# EAGLE board rev1 (EAGLE 9.4.2)
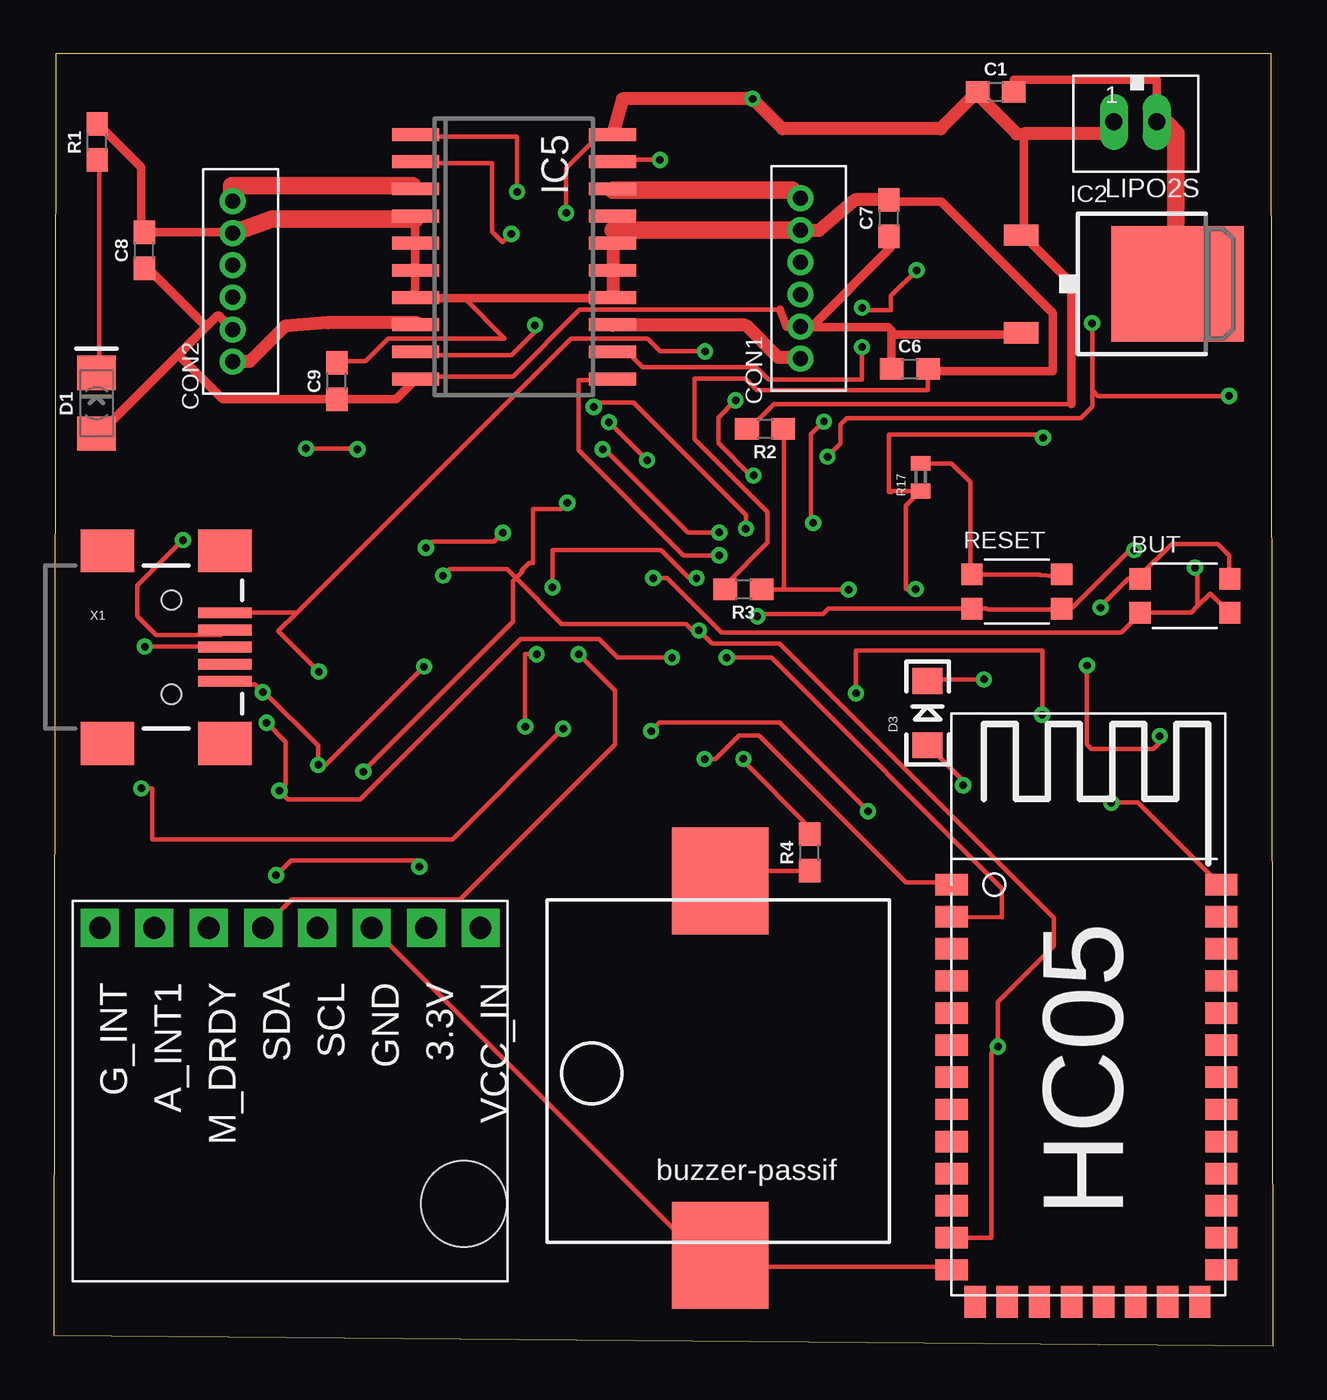
[diagram p0: board, top side]
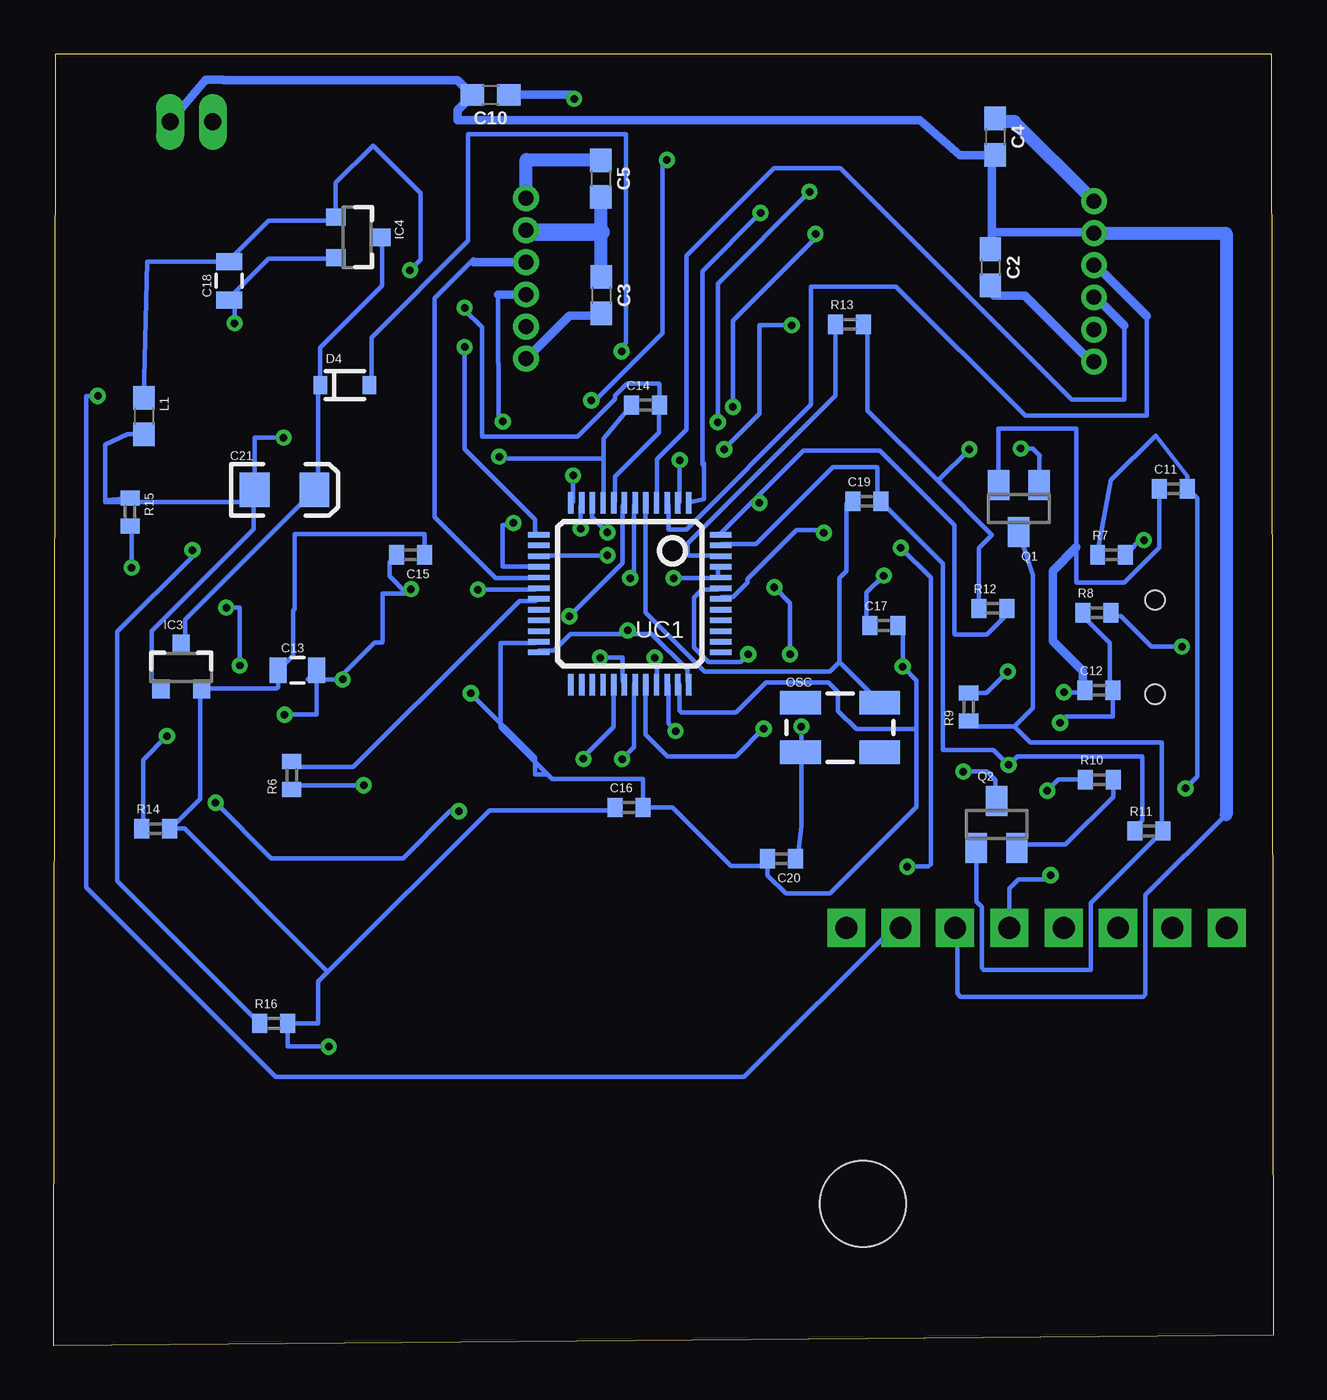
[diagram p1: board, bottom side, seen from below]

Size 57 x 60.4 mm. Coordinates in mm from the lower left corner, seen from the top.
Outline: 0,0.5 57,0 56.9,60.4 0.1,60.4 0,0.5
Copper layers (1*16): Top 0.035mm / dielectric 1.5mm / Bottom 0.035mm
Design rules "default": minimum track width 6mil, minimum drill 0.35mm, track to track 6mil, track to pad 6mil, pad to pad 6mil, via to via 6mil, smd to smd 6mil, copper to edge 40mil, drill to drill 6mil, minimum pad ring 10mil, minimum via ring 8mil, stop-mask expansion 4mil, vias tented up to drill 0mil, thermal gap 10mil
Net classes: 0 default: width 0.203 mm; 2 bigalime: width 0.381 mm

## Footprints (pad centres in the part's own frame; a part is rotated, then mirrored left to right if it is on the bottom)
PUSHBUTTON-KMR241GLFS = smd 1 x 1: P$1 2.1,0.8; P$2 2.1,-0.8; P$3 -2.1,0.8; P$4 -2.1,-0.8
0603 = smd 1.1 x 1: 1 -0.85,0; 2 0.85,0
C0402 = smd 0.7 x 0.9: 1 -0.65,0; 2 0.65,0
0805 = smd 0.8 x 1.2: 1 -0.9,0; 2 0.9,0
EIA3216 = smd 1.4 x 1.6: A 1.4,0; C -1.4,0
B6B-ZR = drill 0.7: 1 9,-1.3; 2 7.5,-1.3; 3 6,-1.3; 4 4.5,-1.3; 5 3,-1.3; 6 1.5,-1.3
FKIT-LED-1206 = smd 1.6 x 1.803: A -1.422,0; C 1.422,0
LED-1206 = smd 1.2 x 1.4: A -1.5,0; C 1.5,0
SOD-323 = smd 0.63 x 0.83: 1 -1.15,0; 2 1.15,0
DPACK_3 = smd 1 x 1.6: 1 -2.28,-4.8; 3 2.28,-4.8 | smd 5.4 x 6.2: 4 0,2.5
SOT23 = smd 0.8 x 0.9: 1 -0.95,-1; 2 0.95,-1; 3 0,1.1
SO20 = smd 0.6 x 2.2: 1 -5.715,-4.6; 2 -4.445,-4.6; 3 -3.175,-4.6; 4 -1.905,-4.6; 5 -0.635,-4.6; 6 0.635,-4.6; 7 1.905,-4.6; 8 3.175,-4.6; 9 4.445,-4.6; 10 5.715,-4.6; 11 5.715,4.6; 12 4.445,4.6; 13 3.175,4.6; 14 1.905,4.6; 15 0.635,4.6; 16 -0.635,4.6; 17 -1.905,4.6; 18 -3.175,4.6; 19 -4.445,4.6; 20 -5.715,4.6
JST_B2B-PH_HEADER = drill 0.8 long: P1 1.075,0.048; P2 -0.925,0.048
CRYSTAL-SMD-5X3 = smd 1.9 x 1.1: 1 -1.85,-1.15; 2 1.85,-1.15; 3 1.85,1.15; 4 -1.85,1.15
SOT23' = smd 1 x 1.4: 1 -0.95,-1.1; 2 0.95,-1.1; 3 0,1.1
BUZZER-PASSIF = smd 4.5 x 5: P$1 0,2.5; P$2 0,20
HC-05 = smd 1.5 x 1: 3.3 0,-16.5; GND 0,-18; KEY 12.6,0; P$3 0,-3; P$4 0,-4.5; P$5 0,-6; P$6 0,-7.5; P$7 0,-9; P$8 0,-10.5; P$9 0,-12; P$10 0,-13.5; P$11 0,-15; P$23 12.6,-1.5; P$24 12.6,-3; P$25 12.6,-4.5; P$26 12.6,-6; P$27 12.6,-7.5; P$28 12.6,-9; P$29 12.6,-10.5; P$30 12.6,-12; P$31 12.6,-13.5; P$32 12.6,-15; P$33 12.6,-16.5; P$34 12.6,-18; RX 0,-1.5; TX 0,0 | smd 1 x 1.5: P$14 1.1,-19.5; P$15 2.6,-19.5; P$16 4.1,-19.5; P$17 5.6,-19.5; P$18 7.1,-19.5; P$19 8.6,-19.5; P$20 10.1,-19.5; P$21 11.6,-19.5
GY-85 = drill 1.016 pad 1.778 square: 3.3 0,15.24; A_INT1 0,2.54; G_INT 0,0; GND 0,12.7; M_DRDY 0,5.08; SCL 0,10.16; SDA 0,7.62; VCC_IN 0,17.78 | hole 4: 12.9,17
LQFP48 = smd 0.254 x 1: 1 -2.75,-4.25; 2 -2.25,-4.25; 3 -1.75,-4.25; 4 -1.25,-4.25; 5 -0.75,-4.25; 6 -0.25,-4.25; 7 0.25,-4.25; 8 0.75,-4.25; 9 1.25,-4.25; 10 1.75,-4.25; 11 2.25,-4.25; 12 2.75,-4.25; 25 2.75,4.25; 26 2.25,4.25; 27 1.75,4.25; 28 1.25,4.25; 29 0.75,4.25; 30 0.25,4.25; 31 -0.25,4.25; 32 -0.75,4.25; 33 -1.25,4.25; 34 -1.75,4.25; 35 -2.25,4.25; 36 -2.75,4.25 | smd 1 x 0.254: 13 4.25,-2.75; 14 4.25,-2.25; 15 4.25,-1.75; 16 4.25,-1.25; 17 4.25,-0.75; 18 4.25,-0.25; 19 4.25,0.25; 20 4.25,0.75; 21 4.25,1.25; 22 4.25,1.75; 23 4.25,2.25; 24 4.25,2.75; 37 -4.25,2.75; 38 -4.25,2.25; 39 -4.25,1.75; 40 -4.25,1.25; 41 -4.25,0.75; 42 -4.25,0.25; 43 -4.25,-0.25; 44 -4.25,-0.75; 45 -4.25,-1.25; 46 -4.25,-1.75; 47 -4.25,-2.25; 48 -4.25,-2.75
USB-MINIB = smd 2.5 x 0.5: D+ 2.5,0; D- 2.5,0.8; GND 2.5,-1.6; ID 2.5,-0.8; VBUS 2.5,1.6 | smd 2.5 x 2: GND@1 -3,-4.5; GND@2 -3,4.5; GND@3 2.5,4.5; GND@4 2.5,-4.5 | hole 0.9: 0,2.2; 0,-2.2

## Placement (x,y rotation side)
BUT  KMR211GLFS  [PUSHBUTTON-KMR241GLFS]  52.87,35.06 0 top
C1  0.1uF  [0603]  44.03,58.61 0 top
C2  22nF  [0603]  13.22,50.41 270 bottom
C3  22nF  [0603]  31.41,49.11 270 bottom
C4  22nF  [0603]  13,56.51 270 bottom
C5  22nF  [0603]  31.43,54.56 270 bottom
C6  0.1uF  [0603]  40.02,45.66 0 top
C7  22nF  [0603]  39.04,52.71 90 top
C8  22nF  [0603]  4.24,51.2 90 top
C9  22nF  [0603]  13.24,45.09 90 top
C10  22nF  [0603]  36.58,58.46 180 bottom
C11  47pF  [C0402]  4.67,40.06 0 bottom
C12  47pF  [C0402]  8.14,30.64 0 bottom
C13  10uF  [0805]  45.6,31.58 0 bottom
C14  1uF  [C0402]  29.33,43.97 0 bottom
C15  1uF  [C0402]  40.32,36.97 180 bottom
C16  1uF  [C0402]  30.11,25.17 0 bottom
C17  1uF  [C0402]  18.2,33.67 0 bottom
C18  10uF  [0805]  48.79,49.78 90 bottom
C19  18pF  [C0402]  18.99,39.47 0 bottom
C20  18pF  [C0402]  22.98,22.77 180 bottom
C21  100uF  [EIA3216]  46.21,40.01 0 bottom
CON1  B6B-ZR  [B6B-ZR]  33.61,44.64 90 top
CON2  B6B-ZR  [B6B-ZR]  7.07,44.5 90 top
D1  [FKIT-LED-1206]  2.01,44.06 90 top
D3  Blue  [LED-1206]  40.85,29.58 90 top
D4  [SOD-323]  43.39,44.91 0 bottom
IC2  MC78M05ABDT  [DPACK_3]  50.02,49.63 270 top
IC3  MCP1703T-3302E/CB  [SOT23]  51.03,31.71 0 bottom
IC4  MCP1703T-3302E/CB  [SOT23]  42.81,51.81 270 bottom
IC5  L293DD  [SO20]  21.52,50.9 270 top
L1  ferrite bead  [0603]  52.78,43.46 270 bottom
LIPO2S  JST-PH_2-PIN_HEADER  [JST_B2B-PH_HEADER]  50.63,57.25 180 top
OSC  8MHz  [CRYSTAL-SMD-5X3]  20.24,28.9 0 bottom
Q1  NPN-BJT  [SOT23']  11.89,39.13 180 bottom
Q2  NPN-BJT  [SOT23']  12.93,24.38 0 bottom
R1  133  [0603]  2.04,56.27 90 top
R2  60k  [0603]  33.26,42.86 180 top
R3  30k  [0603]  32.25,35.36 180 top
R4  100  [0603]  35.34,23.06 90 top
R6  1k  [C0402]  45.87,26.67 90 bottom
R7  22  [C0402]  7.56,36.97 0 bottom
R8  22  [C0402]  8.25,34.27 0 bottom
R9  10k  [C0402]  14.24,29.87 90 bottom
R10  1.5k  [C0402]  8.13,26.47 0 bottom
R11  36k  [C0402]  5.82,24.07 0 bottom
R12  47k  [C0402]  13.11,34.47 0 bottom
R13  1k  [C0402]  19.8,47.75 0 bottom
R14  1k  [C0402]  52.23,24.18 0 bottom
R15  10k  [C0402]  53.42,38.98 270 bottom
R16  10k  [C0402]  46.71,15.08 0 bottom
R17  1k  [C0402]  40.52,40.6 90 top
RESET  KMR211GLFS  [PUSHBUTTON-KMR241GLFS]  45.02,35.26 0 top
U$1  BUZZER-PASSIF  [BUZZER-PASSIF]  31.16,1.74 0 top
U$4  HC05  [HC-05]  41.97,21.56 0 top
U$6  GY-85  [GY-85]  2.17,19.54 270 top
UC1  STM32F103CBT6  [LQFP48]  30.07,35.16 180 bottom
X1  USB-MINIB  [USB-MINIB]  5.52,32.66 0 top

## Library data of the parts
BUT IC3 IC4 RESET = okie
C1 C6 = SparkFun-Capacitors; PROD_ID: CAP-00810
C2-C5 C7-C10 = SparkFun-Capacitors; PROD_ID: CAP-07885
C11 C12 C14-C17 C19 C20 D3 R6-R17 = SparkFun
C13 C18 OSC Q1 Q2 X1 = SparkFun2
C21 D4 L1 = SparkFun3
CON1 CON2 = jst
D1 = SparkFun-LED
IC2 = linear
IC5 = st-microelectronics; OC_FARNELL: unknown
LIPO2S = srg
R1-R4 = SparkFun-Resistors; PROD_ID: RES-08787
U$1 = buzzer_smd
U$4 = rhoban; FARNELL: MODULE HC-05
U$6 = rhoban
UC1 = stm32

## Nets
1A: IC5.2 UC1.11
2A: IC5.9 UC1.10
3/AIN: R2.1 R3.1 UC1.18
3A: IC5.12 UC1.13
4A: IC5.19 UC1.12
5V: C6.1 C7.1 C8.1 C9.1 CON1.5 CON2.5 D1.A IC2.3 IC5.10
23_USBDP: C12.2 R8.1 R10.1 UC1.33
24_USBDM: C11.2 R7.1 UC1.32
27/PWM: R4.2 UC1.29
32: BUT.P$2 BUT.P$4 R15.2 UC1.44 UC1.45
33: R6.2 UC1.19
+5V/2: D4.2 R9.2 X1.VBUS
AV+: C14.1 C18.1 IC4.2 U$6.3.3 UC1.9
AV-: C14.2 C18.2 IC4.1 L1.1 UC1.8
DGND: C11.1 C12.1 C13.2 C15.2 C16.2 C17.2 C19.2 C20.2 C21.C D3.C IC3.1 L1.2 Q1.2 R11.1 R15.1 R17.1 UC1.23 UC1.35 UC1.47 X1.GND
DISC: R13.1 UC1.46
EN: U$4.KEY UC1.34
GNDA: C1.2 C2.1 C3.1 C4.2 C5.2 C6.2 C7.2 C8.2 C9.2 C10.2 CON1.2 CON2.2 IC2.4 IC5.4 IC5.5 IC5.6 IC5.7 IC5.14 IC5.15 IC5.16 IC5.17 LIPO2S.P2 R1.2 R3.2 U$1.P$1 U$4.GND U$6.GND
MM4: CON2.3 UC1.3
MM5: CON2.4 UC1.4
MM6: CON1.4 UC1.16
MM7: CON1.3 UC1.17
MM28: IC5.1 UC1.2
MM29: IC5.11 UC1.15
N$1: D1.C R1.1
N$2: R4.1 U$1.P$2
N$20: BUT.P$1 BUT.P$3 R14.1
N$21: R17.2 RESET.P$1 RESET.P$3
N$22: D3.A R6.1
N$51: Q2.2 R10.2
N$59: R7.2 X1.D-
N$60: R8.2 X1.D+
N$71: Q1.3 Q2.1 R9.1 R11.2
N$73: Q1.1 R12.1 R13.2
NONE: U$6.VCC_IN
OSC_IN: C19.1 OSC.3 UC1.5
OSC_OUT: C20.1 OSC.1 UC1.6
OUT1: C4.1 CON2.1 IC5.3
OUT2: C2.2 CON2.6 IC5.8
OUT3: C3.2 CON1.6 IC5.13
OUT4: C5.1 CON1.1 IC5.18
RESET: R16.1 RESET.P$2 RESET.P$4 UC1.7
RX: U$4.RX UC1.30
SCL: U$6.SCL UC1.42
SDA: U$6.SDA UC1.43
TX: U$4.TX UC1.31
VBAT: C1.1 C10.1 IC2.1 IC5.20 LIPO2S.P1 R2.2 UC1.1
VCC: C13.1 C15.1 C16.1 C17.1 IC3.2 Q2.3 R12.2 R14.2 R16.2 U$4.3.3 UC1.24 UC1.36 UC1.48
VIN: C21.A D4.1 IC3.3 IC4.3

## Tracks (layer width: path | path; a pad name or v marks a point on that pad's centre or on a via)
1A  (via drill 0.35)
  Top 0.203: v32.36,38.19 32.36,38.84 27.11,44.08 25.45,44.08 v25.25,43.88 | v21.39,51.97 20.99,51.57 20.49,52.07 20.49,55.26 17.07,55.26 IC5.2
  Bottom 0.203: v32.36,38.19 32.36,39.26 UC1.11 | v25.25,43.88 25.25,47.92 21.39,51.77 v21.39,51.97
2A  (via drill 0.35)
  Top 0.203: v31.11,38.02 29.65,38.02 25.76,41.91 v25.66,41.91 | IC5.9 17.06,46.31 21.41,46.31 22.5,47.41 v22.5,47.71
  Bottom 0.203: v31.11,38.02 31.83,38.73 31.83,39.26 UC1.10 | v25.66,41.91 24,43.56 24,47.71 v22.5,47.71
3/AIN  (via drill 0.35)
  Top 0.203: 34.14,35.35 33.25,35.35 R3.1 | 34.14,35.35 v37.16,35.35 | 34.14,35.35 34.14,42.82 R2.1
  Bottom 0.203: v37.16,35.35 34.49,35.35 UC1.18
3A  (via drill 0.35)
  Top 0.203: v37.78,46.68 37.78,45.15 33.42,45.15 32.82,45.75 27.52,45.75 26.82,46.45 IC5.12
  Bottom 0.203: v37.78,46.68 37.78,41.91 34.49,38.62 34.49,38.02 UC1.13
4A  (via drill 0.35)
  Top 0.203: v32.72,40.68 32.57,40.68 31.07,42.18 31.07,43.39 v31.87,44.19 | IC5.19 26.2,55.43 v28.34,55.43
  Bottom 0.203: v32.72,40.68 32.72,39.44 UC1.12 | v31.87,44.19 31.67,44.19 28.54,47.33 28.54,55.43 v28.34,55.43
5V
  Top 0.203: 39.17,47.47 39.02,47.62 | 35.03,47.62 CON1.5 | 39.12,51.32 39.12,51.44 C7.1 | 45.16,47.26 IC2.3 | 13.34,44.24 C9.1 13.16,44.24 | 16.89,45.13 IC5.10 17.07,45.31 21.47,45.31 24.59,48.43 33.94,48.43 | 4.49,50.28 4.27,50.28 C8.1 | 2.13,42.64 D1.A | 7.64,48.15 7.72,48.15
  Top 0.406: 39.17,47.47 C6.1 39.17,47.26 45.16,47.26 | 35.03,47.62 35.42,47.62 | 35.42,47.62 39.02,47.62 | 35.42,47.62 39.12,51.32 | 13.34,44.24 16,44.24 16.89,45.13 | 7.13,47.64 4.49,50.28 | 7.13,47.64 7.64,48.15 | 7.13,47.64 5.82,46.33 | 5.82,46.33 2.13,42.64 | 13.16,44.24 7.91,44.24 5.82,46.33 | CON1.5 34.26,47.64 33.94,48.43 | 7.72,48.15 CON2.5
23_USBDP  (via drill 0.35)
  Top 0.203: v9.96,29.13 10.86,28.23 10.86,26.25 v10.56,25.95 10.97,25.54 14.34,25.54 21.84,33.04 25.49,33.04 26.36,32.17 v28.9,32.17
  Bottom 0.203: R8.1 8.89,34.1 7.64,32.86 7.64,30.73 C12.2 7.49,29.43 9.66,29.43 v9.96,29.13 | v10.56,25.95 10.04,26.47 R10.1 | v28.9,32.17 28.8,32.07 28.8,30.93 UC1.33
24_USBDM  (via drill 0.35)
  Top 0.203: v23.81,28.85 18.65,23.68 4.6,23.68 4.6,26.06 v4.1,26.06
  Bottom 0.203: R7.1 8.21,37.06 7.59,40.46 5.5,42.55 4.02,40.65 C11.2 3.91,39.97 3.56,39.62 3.56,26.6 v4.1,26.06 | v23.81,28.85 25.11,27.55 28.3,27.55 29.34,28.58 29.34,30.9 UC1.32
27/PWM  (via drill 0.35)
  Top 0.203: R4.2 35.34,24.24 32.24,27.34 v32.24,27.44
  Bottom 0.203: v32.24,27.44 32.24,27.54 30.84,28.94 30.84,30.91 UC1.29
32  (via drill 0.35)
  Top 0.203: v53.35,36.37 53.45,36.37 53.45,34.57 | BUT.P$2 54.94,34.28 54.05,35.17 53.45,34.57 | 53.45,34.57 53.16,34.28 50.85,34.28 BUT.P$4 50.67,34.1 49.91,33.34 31.23,33.34 28.68,35.88 v28.03,35.88
  Bottom 0.203: 25.96,35.88 25.96,36.42 UC1.45 | v53.35,36.37 53.35,38.33 R15.2 | v28.03,35.88 25.96,35.88 | 25.96,35.88 UC1.44
33
  Bottom 0.203: R6.2 45.6,27.05 42.99,27.05 40.77,29.27 39.27,30.77 35.23,34.81 34.49,34.81 UC1.19
+5V/2  (via drill 0.35)
  Top 0.203: v30.45,46.48 28.35,46.48 27.75,47.08 24.18,47.08 11.38,34.28 | 11.38,34.28 10.51,33.41 v12.4,31.52 | 11.38,34.28 8.18,34.28 X1.VBUS
  Bottom 0.203: v30.45,46.48 30.55,46.58 30.25,46.88 30.25,56.63 37.62,56.63 37.62,51.65 42.14,47.13 42.14,44.95 D4.2 | R9.2 13.4,30.52 v12.4,31.52
AV+  (via drill 0.35)
  Top 0.203: v36.17,41.56 36.77,42.16 36.77,43.06 37.07,43.36 48.01,43.36 48.54,43.9 v48.54,47.8 48.54,44.66 48.8,44.4 v54.93,44.4 | v54.93,44.4
  Bottom 0.203: 31.29,41.46 31.29,42.4 C14.1 | 31.29,41.46 31.29,39.44 UC1.9 | IC4.2 43.98,50.82 46.94,50.82 48.72,49.04 C18.1 48.72,48.86 48.54,48.68 v48.54,47.8 | v36.17,41.56 36.07,41.46 31.29,41.46 | U$6.3.3 17.42,19.52 17.78,19.52 24.73,12.58 46.62,12.58 55.47,21.44 55.47,44.4 v54.93,44.4
AV-  (via drill 0.35)
  Top 0.203: v37.78,48.52 37.88,48.42 39.14,48.42 39.14,49.07 v40.34,50.27
  Bottom 0.203: UC1.8 30.76,39.44 30.76,40.63 28.7,42.68 28.7,43.95 C14.2 28.68,44.94 28.71,44.97 30.2,44.97 30.76,44.42 30.76,44.24 32.5,42.49 36.97,42.49 36.97,47.61 37.78,48.42 v37.78,48.52 | L1.1 52.62,50.68 C18.2 48.72,50.82 46.94,52.59 43.98,52.59 IC4.1 43.81,54.36 42.07,56.1 39.84,53.87 39.84,50.77 v40.34,50.27
DGND  (via drill 0.35)
  Top 0.203: X1.GND 8.18,30.9 9.42,30.9 v9.78,30.55 9.88,30.55 12.37,28.06 v12.37,27.16 12.72,27.16 v17.31,31.75 | v40.29,35.37 39.84,35.37 39.84,39.26 R17.1 39.19,39.95 39.15,39.91 39.05,39.91 39.05,42.58 46.12,42.58 v46.25,42.45 | v43.48,31.15 40.92,31.15 D3.C | v46.2,29.5 46.2,32.5 37.5,32.5 v37.5,30.5
  Bottom 0.203: 8.89,30.73 C12.1 8.89,30.55 v9.78,30.55 | C11.1 5.33,39.97 5.33,37.3 6.96,35.68 9.19,35.68 9.19,37.33 9.19,42.87 12.84,42.87 Q1.2 | R11.1 6.47,24.22 6.12,24.57 6.12,27.56 11.97,27.56 v12.37,27.16 13.07,27.86 15.45,27.86 15.45,36.57 18.31,39.44 C19.2 18.49,39.62 18.49,41.05 18.52,41.08 20.57,41.08 24.17,37.48 25.78,37.48 UC1.47 | 54.59,39.53 54.59,42.12 53.53,42.61 L1.2 | 54.59,39.53 54.59,39.44 47.65,39.44 | IC3.1 52.42,31.15 52.42,33.41 47.65,38.18 47.65,39.44 | 47.65,39.44 47.65,39.97 C21.C | 54.59,39.53 R15.1 | 47.65,39.44 C21.C | v40.29,35.37 40.49,35.17 | 40.49,35.17 41.63,35.17 41.63,32.9 41.68,32.88 42,32.88 43.5,31.38 43.5,31.15 | 40.49,35.17 41.29,35.97 41.29,36.64 C15.2 | v43.48,31.15 43.5,31.15 | 43.5,31.15 45.13,31.15 C13.2 44.7,29.5 v46.2,29.5 | 16.67,28.83 16.67,25.19 20.71,21.15 22.78,21.15 23.63,21.99 C20.2 23.96,22.44 25.34,22.44 28.07,25.17 C16.2 29.46,26.5 33.7,26.5 33.9,26.7 | 16.67,28.83 16.67,31.1 v17.31,31.75 17.31,33.67 C17.2 | 16.67,28.83 19.48,28.83 20.34,29.68 20.34,30.56 20.78,31 23.71,31 25.1,29.61 27.66,29.61 27.74,29.69 27.74,30.9 UC1.35 | UC1.23 34.49,32.86 36.1,32.86 36.1,28.9 33.9,26.7 | 33.9,26.7 34.5,26.7 34.5,27.5 v37.5,30.5 | v46.25,42.45 47.61,42.45 C21.C
  Bottom 0.406: 8.89,30.73 8.89,31.54 10.3,32.95 10.3,36.22 9.19,37.33
DISC
  Bottom 0.203: R13.1 20.45,44.41 27.37,37.49 27.37,37.03 27.29,36.95 25.96,36.95 UC1.46
EN  (via drill 0.35)
  Top 0.203: v27.93,28.74 28.33,29.14 33.91,29.14 v38.06,24.99 | v49.43,25.39 50.67,25.39 54.41,21.66 U$4.KEY
  Bottom 0.203: v27.93,28.74 28.27,29.08 28.27,30.9 UC1.34 | v49.43,25.39 46.83,22.79 40.66,22.79 38.46,24.99 v38.06,24.99
GNDA
  Top 0.203: U$4.GND 41.96,3.7 31.83,3.7 31.29,4.23 U$1.P$1 31.11,4.41 30.05,4.41 14.94,19.52 U$6.GND | 52.45,49.75 IC2.4 | R3.2 31.47,35.53 31.47,35.64 33.37,37.54 33.37,38.96 29.96,42.37 29.96,45.21 32.35,45.21 32.88,44.67 40.87,44.67 C6.2 40.96,45.56 | 4.27,52.06 C8.2 4.09,52.06 | 8.36,52.06 CON2.2 | 2.13,57.04 R1.2 | 26.14,49.04 IC5.14 26.08,48.96 | 26.14,50.11 IC5.15 26.14,50.28 | IC5.17 26.14,52.77 26.14,52.14 26.14,51.71 IC5.16 26.14,51.53 | 16.89,52.77 IC5.4 | 19.2,48.96 21.08,47.08 15.65,47.08 14.58,46.02 13.34,46.02 C9.2 | 16.95,48.96 IC5.7 16.89,49.04 | 16.89,50.11 IC5.6 16.89,50.28 | 16.89,51.53 IC5.5 | CON1.2 | 39.19,53.48 C7.2
  Top 0.406: C1.2 44.88,59.17 51.55,59.17 LIPO2S.P2 | 8.36,52.06 4.27,52.06 | 2.13,57.04 4.09,55.09 4.09,52.06 | 16.89,52.77 16.89,52.66 16.89,51.71 IC5.5 | 16.95,48.96 19.2,48.96 26.08,48.96 | 16.89,49.04 16.89,50.11 | 16.89,50.28 16.89,51.53 | 40.96,45.56 46.71,45.56 46.71,48.27 41.49,53.48 39.19,53.48
  Top 0.61: C7.2 37.47,53.56 35.78,52.14 CON1.2 | 26.14,50.11 26.14,49.04 | 26.14,51.53 26.14,50.28
  Top 0.813: 52.45,49.75 52.45,56.69 52.03,57.11 LIPO2S.P2 | CON1.2 26.14,52.14 | 16.89,52.66 10.19,52.66 CON2.2
  Bottom 0.203: 49.07,59.17 49.04,59.14 | 13.16,51.35 C2.1 | 13.16,55.62 C4.2 | 8.53,52.06 CON2.2 | 34.85,52.06 CON1.2 | 2.2,24.84 5.97,21.07 5.97,16.44 6.08,16.32 14.61,16.32 14.76,16.47 14.76,19.52 U$6.GND | 31.43,52.08 31.41,52.06
  Bottom 0.406: 49.04,59.14 38.11,59.14 C10.2 38.13,57.76 38.13,57.28 16.52,57.28 14.65,55.66 C4.2 | 49.07,59.17 49.89,59.17 LIPO2S.P2 | 13.16,55.62 13.16,52.06 | 13.16,52.06 13.16,51.35 | 8.53,52.06 13.16,52.06
  Bottom 0.61: C3.1 31.41,52.06 | 2.2,24.84 2.2,52 CON2.2 | C5.2 31.43,52.08
  Bottom 0.813: 34.85,52.06 31.41,52.06
MM4
  Bottom 0.203: 5.91,48.12 5.91,43.47 11.59,43.47 17.62,49.51 21.59,49.51 21.59,43.98 27.43,38.15 28.27,38.15 28.27,39.26 UC1.3 | CON2.3 8.3,50.5
  Bottom 0.406: 8.3,50.5 5.91,48.12
MM5
  Bottom 0.203: 6.97,47.67 6.97,44.23 9.41,44.23 20.24,55.05 23.32,55.05 27.43,50.95 27.43,42.83 28.8,41.45 28.8,39.44 UC1.4 | CON2.4 8.3,49
  Bottom 0.406: 8.3,49 6.97,47.67
MM6  (via drill 0.35)
  Top 0.203: v36,43.2 35.4,42.6 35.4,38.56 v35.5,38.46
  Bottom 0.203: v35.5,38.46 35.6,38.36 36,38.36 36,36.42 34.49,36.42 UC1.16 | v36,43.2 36.2,43.41 36.2,45.93 36.22,45.94 36.22,49.14
  Bottom 0.406: 36.22,49.14 CON1.4
MM7
  Bottom 0.203: UC1.17 34.49,35.88 36.35,35.88 39.19,38.73 39.19,48.97 37.38,50.79 37.38,50.64
  Bottom 0.406: 37.38,50.64 CON1.3
MM28  (via drill 0.35)
  Top 0.203: v27.74,41.39 v25.96,43.17 | v21.67,53.94 21.67,56.51 17.07,56.51 IC5.1
  Bottom 0.203: v27.74,41.39 27.74,39.44 UC1.2 | v25.96,43.17 25.96,49.65 v21.67,53.94
MM29  (via drill 0.35)
  Top 0.203: v31.11,36.95 29.45,36.95 24.54,41.86 24.54,45.13 25.96,45.13 IC5.11
  Bottom 0.203: v31.11,36.95 34.31,36.95 UC1.15
N$1
  Top 0.203: R1.1 2.13,55.26 2.13,45.48 D1.C
N$2
  Top 0.203: R4.1 35.2,22.19 31.65,22.19 31.29,21.84 U$1.P$2
N$20  (via drill 0.35)
  Top 0.203: v48.93,34.5 48.93,34.56 50.23,35.86 BUT.P$3 50.77,36 52.25,37.48 54.41,37.48 54.94,36.95 54.94,35.88 BUT.P$1 | v48.3,31.8 48.3,28.1 48.5,27.9 51.4,27.9 51.7,28.2 v51.7,28.5
  Bottom 0.203: R14.1 52.81,24.25 52.81,27.39 v51.7,28.5 | v48.3,31.8 48.3,34.5 v48.93,34.5
N$21
  Top 0.203: R17.2 41.96,41.25 42.85,40.36 42.85,36.2 RESET.P$3 46.08,36.06 46.11,36.03 47.01,35.95 RESET.P$1
N$22  (via drill 0.35)
  Top 0.203: v42.51,26.2 42.51,26.42 D3.A
  Bottom 0.203: R6.1 45.87,26.2 v42.51,26.2
N$51
  Bottom 0.203: R10.2 7.48,25.67 9.71,23.44 11.91,23.44 Q2.2
N$59  (via drill 0.35)
  Top 0.203: v6.04,37.66 3.91,35.53 3.91,34.1 4.8,33.22 7.82,33.22 8,33.39 X1.D-
  Bottom 0.203: v6.04,37.66 6.22,37.66 6.76,37.13 R7.2
N$60  (via drill 0.35)
  Top 0.203: v4.27,32.68 8,32.68 X1.D+
  Bottom 0.203: v4.27,32.68 5.69,32.68 7.11,34.1 7.47,34.1 R8.2
N$71
  Bottom 0.203: 12.09,28.95 11.36,28.21 5.21,28.21 5.21,24.09 R11.2 8.53,20.7 8.53,17.58 13.54,17.58 13.61,17.66 13.61,20.51 13.87,20.77 13.87,23.26 Q2.1 | 12.09,28.95 14.18,28.95 R9.1 | 12.09,28.95 11.23,29.8 11.23,36.03 Q1.3
N$73  (via drill 0.35)
  Top 0.203: v11.8,41.94 14.16,41.94 v14.2,41.9
  Bottom 0.203: R12.1 13.76,37.29 13.15,37.91 15.72,40.48 | R13.2 18.96,47.55 18.96,43.72 15.72,40.48 | Q1.1 10.94,41.56 10.9,41.6 11.24,41.94 v11.8,41.94 | v14.2,41.9 15.62,40.48 15.72,40.48
OSC_IN
  Bottom 0.203: 20.27,31.97 20.27,35.88 19.94,36.22 19.94,39.38 C19.1 | 20.27,31.97 18.49,30.19 OSC.3 | 20.27,31.97 20.73,31.52 26.57,31.52 29.34,34.28 29.34,39.26 UC1.5
OSC_OUT  (via drill 0.35)
  Top 0.203: v30.05,35.88 29.69,35.88 28.38,37.19 23.31,37.19 v23.31,35.46 | v22.05,28.95 22.05,32.33 v22.58,32.33
  Bottom 0.203: C20.1 22.21,22.88 22.05,24.33 22.05,27.7 OSC.1 22.05,27.88 v22.05,28.95 | v30.05,35.88 29.87,36.06 29.87,39.26 UC1.6 | v23.31,35.46 22.58,34.73 v22.58,32.33
OUT1
  Top 0.203: IC5.3 16.77,54.22 | CON2.1 8.33,53.54
  Top 0.813: 16.77,54.22 8.33,54.22 8.33,53.54
  Bottom 0.203: 12.98,57.22 C4.1
  Bottom 0.406: 8.53,53.66 CON2.1
  Bottom 0.61: 12.98,57.22 12.09,57.22 8.53,53.66
OUT2
  Top 0.61: IC5.8 17.01,47.82 12.82,47.82 10.82,47.65 9.17,46 CON2.6
  Bottom 0.203: 13.04,49.09 C2.2 | 8.56,46.04 8.4,46.03 CON2.6
  Bottom 0.406: 13.04,49.09 11.61,49.09 8.56,46.04
OUT3
  Top 0.203: IC5.13 26.14,47.7 | 34.85,46.2 CON1.6
  Top 0.61: 26.14,47.7 32.36,47.7 33.86,46.2 34.85,46.2
  Bottom 0.203: 31.44,48.15 C3.2 | 34.85,46.2 CON1.6
  Bottom 0.406: 31.44,48.15 32.89,48.15 34.85,46.2
OUT4
  Top 0.203: 26.14,54.02 IC5.18
  Top 0.813: 26.14,54.02 34.53,54.02 CON1.1
  Bottom 0.203: 31.46,55.44 C5.1
  Bottom 0.61: 31.46,55.44 34.91,55.44 CON1.1
RESET  (via drill 0.35)
  Top 0.203: v50.51,37.19 50.31,37.19 47.57,34.46 RESET.P$2 47.09,34.43 43.66,34.43 43.63,34.46 RESET.P$4 36.22,34.46 35.96,34.2 32.99,34.2 v32.89,34.1
  Bottom 0.203: R16.1 54.02,21.74 54.02,33.38 50.51,36.89 v50.51,37.19 | v32.89,34.1 30.4,36.59 30.4,39.26 UC1.7
RX  (via drill 0.35)
  Top 0.203: v31.46,32.17 33.55,32.17 44.33,21.39 44.33,20.04 U$4.RX
  Bottom 0.203: v31.46,32.17 30.4,32.17 30.4,31.08 UC1.30
SCL  (via drill 0.35)
  Top 0.203: v10.4,22 11.1,22.7 17.1,22.7 v17.1,22.4 | v17.4,37.3 17.7,37.6 20.6,37.6 v21,38
  Bottom 0.203: U$6.SCL 12.33,21.37 11.9,21.8 10.6,21.8 v10.4,22 | UC1.42 25.78,34.99 25.25,34.99 24.57,35.67 24.57,35.85 22.29,38.13 21.13,38.13 v21,38 | v17.1,22.4 16.1,22.4 16,22.5 16,35.9 v17.4,37.3
SDA  (via drill 0.35)
  Top 0.203: v24.54,32.33 26.24,30.63 26.24,28.1 19,20.87 11.12,20.87 9.96,19.7 U$6.SDA
  Bottom 0.203: v24.54,32.33 24.89,31.97 26.39,31.97 27.07,32.65 27.07,34.97 26.69,35.35 25.96,35.35 UC1.43
TX  (via drill 0.35)
  Top 0.203: v30.43,27.43 30.93,27.43 32.03,28.53 32.96,28.53 39.83,21.66 41.96,21.66 U$4.TX
  Bottom 0.203: v30.43,27.43 29.87,27.98 29.87,30.9 UC1.31
VBAT  (via drill 0.35)
  Top 0.203: v23.96,52.95 23.96,55.04 25.43,56.51 25.96,56.51 IC5.20 | 43.03,58.46 C1.1 43.2,58.46 | 45.02,56.65 45.34,56.65 | R2.2 32.5,42.86 33.66,44.02 47.56,44.02 | 45.34,51.88 IC2.1 45.34,52.06 | v32.67,58.28
  Top 0.406: 47.56,44.02 47.56,49.66 45.34,51.88 | 45.34,52.06 45.34,56.65
  Top 0.61: 43.03,58.46 41.45,56.88 34.07,56.88 v32.67,58.28 26.59,58.28 IC5.20 | LIPO2S.P1 49,56.65 45.34,56.65 | 43.2,58.46 45.02,56.65
  Bottom 0.203: v23.96,52.95 26.67,50.24 26.67,41.19 26.6,41.26 26.6,39.58 UC1.1 | v32.67,58.28 32.67,58.46 | C10.1
  Bottom 0.406: 32.67,58.46 C10.1
VCC  (via drill 0.35)
  Top 0.203: v24.01,39.41 23.71,39.1 22.4,39.1 22.4,36.59 22.23,36.59 21.87,36.24 21.92,36.19 21.62,35.88 | 21.62,35.88 21.48,35.75 21.48,33.85 v14.48,26.85 | 21.62,35.88 23.75,33.75 24.71,33.75 24.73,33.74 29.56,33.74 29.86,33.44 v30.16,33.44 30.77,32.83 33.93,32.83 46.74,20.01 46.74,18.69 44.14,16.09 v44.14,13.99 43.84,13.69 43.84,5.06 U$4.3.3 | 21.62,35.88 21.2,36.3 18.5,36.3 v18.2,36
  Bottom 0.203: 30.16,33.28 32.83,33.28 33.6,32.5 34.31,32.5 UC1.24 | 30.16,33.28 29.05,33.28 27.38,31.61 27.38,31.08 UC1.36 | R12.2 12.46,34.18 13.39,33.25 14.86,33.25 14.89,33.28 14.89,38.36 18.37,41.84 21.96,41.84 24.2,39.59 | 24.2,39.59 25.78,38.02 UC1.48 | 24.2,39.59 v24.01,39.41 | C17.1 18.99,33.68 19,33.69 19,35.2 v18.2,36 | v14.48,26.85 13.38,26.85 12.98,26.45 12.98,25.57 Q2.3 | v30.16,33.44 30.16,33.28 | C15.1 39.67,37.95 45.74,37.95 45.74,34.44 45.8,34.38 45.8,32.28 C13.1 46.5,30.79 46.56,30.73 49.96,30.73 IC3.2 50.14,30.55 50.14,25.57 51.52,24.19 R14.2 50.87,24.18 44.18,17.48 | 44.18,17.48 44.63,17.04 44.63,15.08 R16.2 46.06,13.99 v44.14,13.99 | 44.18,17.48 36.63,25.04 30.76,25.04 C16.1
VIN
  Bottom 0.203: IC3.3 50.85,32.86 50.85,33.95 44.98,39.82 44.98,39.97 C21.A 44.81,40.15 44.63,40.33 44.63,44.77 D4.1 44.54,46.66 41.65,49.55 41.65,51.77 IC4.3